# Altium PCB pmod_ssd.PcbDoc
Units mm, origin at the board's own origin, x right, y up, seen from the top; angles counter-clockwise.
Board outline 37.9 x 43.4 mm, 2 copper layers (Top Layer, Bottom Layer); 12 components, 20 nets, 58 pads, 13 vias.
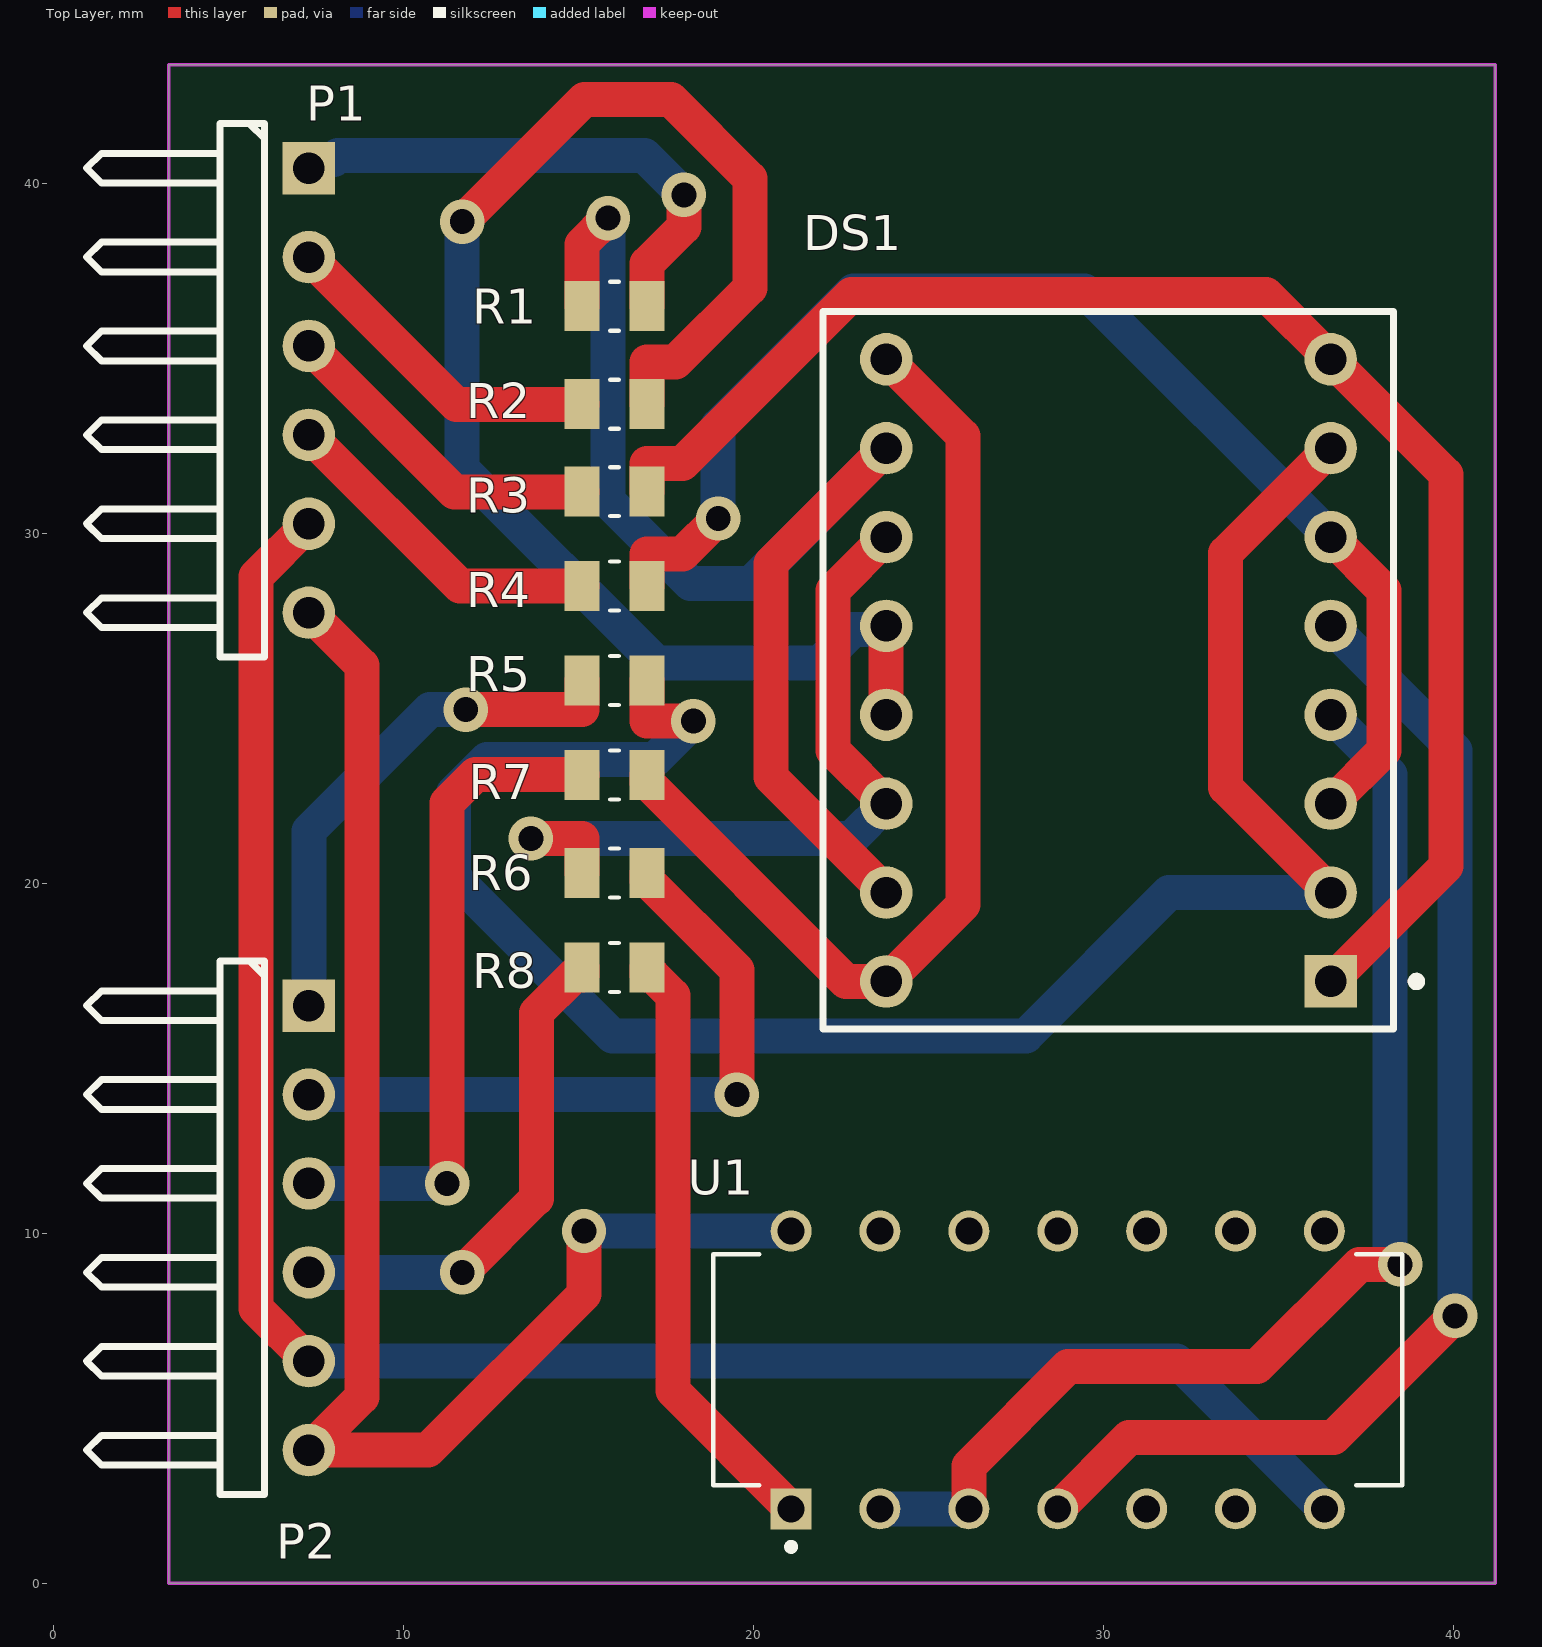
[diagram p0: Top Layer view]
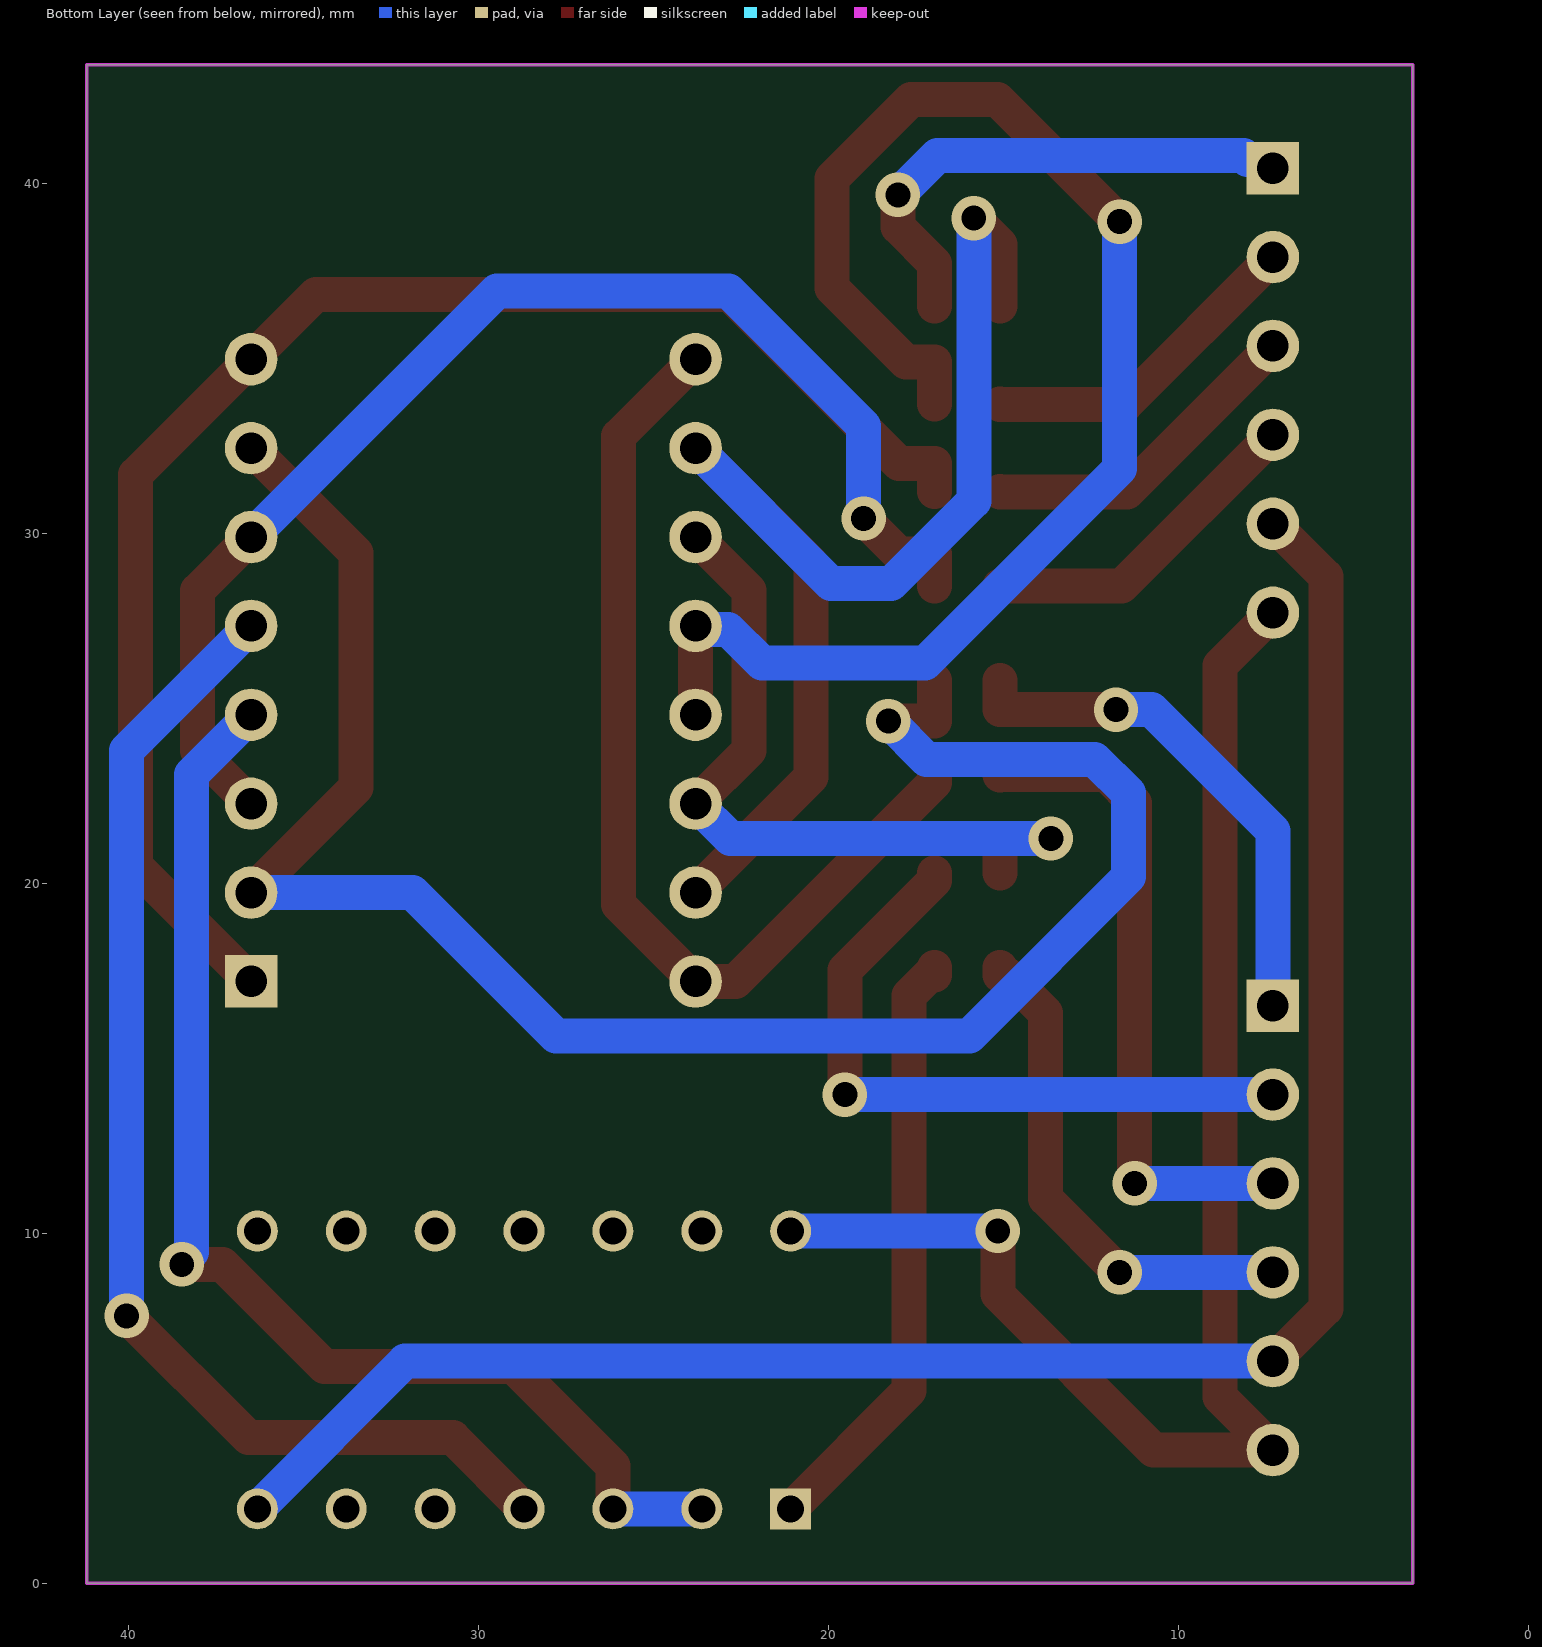
[diagram p1: Bottom Layer view, seen from below]

## Layer stack, top to bottom
Top Solder: solder mask 0.0102, Solder Resist, Dk 3.5
Top Layer: signal copper 0.0356
Dielectric 1: dielectric 0.32, FR-4, Dk 4.8
Bottom Layer: signal copper 0.0356
Bottom Solder: solder mask 0.0102, Solder Resist, Dk 3.5

## Board outline
3.3,0 41.2,0 41.2,43.4 3.3,43.4

## Design rules (kind name [scope] priority, off if disabled: settings)
Clearance [All] p1: gap=0.254 ignorepadtopadclearanceinfootprint=FALSE except(0: Arc-Hole Track-Hole SMDPad-Hole THPad-Hole Via-Hole Fill-Hole Poly-Hole Region-Hole Text-Hole)
PolygonConnect [All] p1: connectstyle=Relief reliefconductorwidth=0.254 reliefentries=4 polygonreliefangle="90 Angle" airgapwidth=0.254
RoutingVias [All] p1: holewidth=0.711 width=1.27 viastyle="Through Hole" minholewidth=0.711 minwidth=1.27 maxholewidth=0.711 maxwidth=1.27
SolderMaskExpansion [All] p1: expansion=0.102 istentingtop=FALSE
Width [All] p1: maxlimit=1.1 minlimit=0.9 preferedwidth=1
30 further rules are at their usual default settings.

## Components (designator, comment, footprint, x,y, rotation, side; value= is the part's Value field where it differs from the comment)
DS1 "HDSP-G03A" G-16 30.15,0.69 r90 top
P1 "J1" HDR1X6H 7.3,40.44 r270 top
P2 "J2" HDR1X6H 7.3,16.51 r270 top
R1 "5-2176327-9" RESC2012X65N 16.035,36.5 r180 top
R2 "5-2176327-9" RESC2012X65N 16.035,33.7 r0 top
R3 "5-2176327-9" RESC2012X65N 16.035,31.2 r0 top
R4 "5-2176327-9" RESC2012X65N 16.035,28.5 r0 top
R5 "5-2176327-9" RESC2012X65N 16.035,25.8 r0 top
R6 "5-2176327-9" RESC2012X65N 16.035,20.3 r180 top
R7 "5-2176327-9" RESC2012X65N 16.035,23.1 r0 top
R8 "5-2176327-9" RESC2012X65N 16.035,17.6 r0 top
U1 "CD74HC14EE4" DIP794W45P254L1969H508Q14 28.7,6.1 r90 top

## Footprints (in the part's own frame and the unit in brackets; to place one, negate y for a bottom-side part, rotate by r counter-clockwise, add the part's x,y. Pads: shape width x height; smd on the part's side, far side on the other; paste and mask are expansions set on the pad)
DIP794W45P254L1969H508Q14 [mm]
  rect 1.17x1.17 / inner round 1.17 / far side rect 1.17x1.17 hole 0.77: 1(-3.97,7.62)
  round 1.17 hole 0.77: 2(-3.97,5.08) 3(-3.97,2.54) 4(-3.97,0) 5(-3.97,-2.54) 6(-3.97,-5.08) 7(-3.97,-7.62) 8(3.97,-7.62) 9(3.97,-5.08) 10(3.97,-2.54) 11(3.97,0) 12(3.97,2.54) 13(3.97,5.08) 14(3.97,7.62)
  silkscreen extent -5.15,-9.85 3.3,9.84, body extent -4.1,-9.65 4.1,9.65, height 5.08
G-16 [mm] "LED, 7-Segment Display, 10.16 mm, Dual Digit; 16 Leads; Row Space 12.7 mm; Pitch 2.54 mm"
  rect 1.5x1.5 hole 0.9: 1(16.51,-6.35)
  round 1.5 hole 0.9: 2(19.05,-6.35) 3(21.59,-6.35) 4(24.13,-6.35) 5(26.67,-6.35) 6(29.21,-6.35) 7(31.75,-6.35) 8(34.29,-6.35) 9(34.29,6.35) 10(31.75,6.35) 11(29.21,6.35) 12(26.67,6.35) 13(24.13,6.35) 14(21.59,6.35) 15(19.05,6.35) 16(16.51,6.35)
  silkscreen extent 15.15,-8.93 35.65,8.15
HDR1X6H [mm] "Connector; Header; 6 Position; Right Angle"
  rect 1.5x1.5 hole 0.9: 1(0,0)
  round 1.5 hole 0.9: 2(2.54,0) 3(5.08,0) 4(7.62,0) 5(10.16,0) 6(12.7,0)
  silkscreen extent -1.27,-6.35 13.97,-1.27
RESC2012X65N [mm]
  rect 1x1.42 smd: 1(-0.935,0) 2(0.935,0)
  silkscreen extent -0.12,-0.7 0.12,0.7

## Part data
DS1: "10.16 mm 2-Digit General Purpose AlGaAs Red 7-Segment Display: CC, RH DP", LED_Colour="AlGaAs Red", PackageDocument=20-Aug-2001, ComponentLink1Description="Manufacturer Link", ComponentLink1URL=http://www.agilent.com/, ComponentLink2Description=Datasheet, ComponentLink2URL=http://cp.literature.agilent.com/litweb/pdf/5988-2972EN.pdf, DatasheetDocument=20-Aug-2001, LatestRevisionDate=11-Oct-2004, LatestRevisionNote="Display outline superimposed on PCB Footprint.", LuminousIntensity="3200 ucd (Minimum).", PackageReference=G-16, Published=26-May-2004, Publisher="Altium Limited"
P1 P2: library part "Header 6H", "Header, 6-Pin, Right Angle", LatestRevisionDate=17-Jul-2002, LatestRevisionNote="Re-released for DXP Platform.", Publisher="Altium Limited"
R1 R2 R3 R4 R5 R6 R7 R8: "Fixed Resistor CRGP 0805 680K 1%", Package=None, Availability=Unavailable, MP=5-2176327-9, Price=None
U1: "High Speed CMOS Logic Hex Schmitt-Triggered Inverters 14-PDIP -55 to 125", Package="PDIP-14 Texas Instruments", Availability="In Stock", Check_prices=https://www.snapeda.com/parts/CD74HC14EE4/Texas+Instruments/view-part/?ref=eda, MF="Texas Instruments", MP=CD74HC14EE4, Price=None, Purchase-URL=https://pricing.snapeda.com/search/part/CD74HC14EE4/?ref=eda, SnapEDA_Link=https://www.snapeda.com/parts/CD74HC14EE4/Texas+Instruments/view-part/?ref=snap

## Via types
v1: diameter 1.27, hole 0.711, Top Layer to Bottom Layer, 13 vias

## Nets (pads, with @x,y where several pads share a name; then routed paths per layer and width w, separated by ;. In a path a pad name is that pad's centre, name@x,y a point inside that pad or via, vN(x,y) a via of type N, cw(c..) or ccw(c..) an arc to the next point about the centre after c; other vN are vias at no path point)
GND: P1.5 P2.5 U1.7 | length 55.9
  Top Layer w1: P2.5 5.791,7.859 5.791,28.771 P1.5
  Bottom Layer w1: P2.5 32.1,6.35 U1.7
NetDS1_1: DS1.1 DS1.8 R3.2 | length 43.6
  Top Layer w1: R3.2 16.97,32.004 17.983,32.004 22.809,36.83 34.65,36.83 DS1.8 39.8,31.68 39.8,20.5 DS1.1
NetDS1_2: DS1.2 DS1.7 R5.2 | length 56.4
  Top Layer w1: R5.2 16.97,24.638 v1(18.288,24.638) ; DS1.2 33.5,22.74 33.5,29.44 DS1.7
  Bottom Layer w1: v1(18.288,24.638) 17.196,23.546 12.395,23.546 11.43,22.581 11.43,20.193 15.977,15.646 27.788,15.646 31.881,19.74 DS1.2
NetDS1_3: DS1.3 DS1.6 R4.2 | length 36.9
  Top Layer w1: R4.2 16.97,29.413 17.983,29.413 v1(18.999,30.429) ; DS1.3 38.024,23.804 38.024,28.376 DS1.6
  Bottom Layer w1: v1(18.999,30.429) 18.999,33.071 22.86,36.932 29.468,36.932 DS1.6
NetDS1_4: DS1.4 U1.2 U1.3 | length 35
  Top Layer w1: U1.3 26.16,3.36 28.998,6.198 34.398,6.198 37.319,9.119 v1(38.481,9.119)
  Bottom Layer w1: U1.2 U1.3 ; DS1.4 38.2,23.12 38.2,9.473 38.481,9.192 v1(38.481,9.119)
NetDS1_5: DS1.5 U1.4 | length 34.8
  Top Layer w1: U1.4 30.736,4.166 36.576,4.166 v1(40.056,7.645)
  Bottom Layer w1: DS1.5 40.056,23.804 v1(40.056,7.645)
NetDS1_9: DS1.9 DS1.16 R7.2 | length 29
  Top Layer w1: R7.2 16.97,22.885 22.655,17.2 DS1.16 26,19.4 26,32.78 DS1.9
NetDS1_10: DS1.10 DS1.15 R1.2 | length 36.9
  Top Layer w1: R1.2 15.1,38.265 v1(15.85,39.014) ; DS1.15 20.5,23.04 20.5,29.14 DS1.10
  Bottom Layer w1: v1(15.85,39.014) 15.85,30.933 18.208,28.575 19.935,28.575 DS1.10
NetDS1_11: DS1.11 DS1.14 R6.2 | length 21.9
  Top Layer w1: v1(13.644,21.285) 15.1,21.285 R6.2 ; DS1.14 22.276,23.804 22.276,28.376 DS1.11
  Bottom Layer w1: v1(13.644,21.285) 22.805,21.285 DS1.14
NetDS1_12: DS1.12 DS1.13 R2.2 | length 43.2
  Top Layer w1: v1(11.684,38.913) 15.171,42.4 17.646,42.4 19.9,40.146 19.9,37.02 17.78,34.9 16.97,34.9 R2.2 ; DS1.13 DS1.12
  Bottom Layer w1: v1(11.684,38.913) 11.684,31.852 17.236,26.3 21.906,26.3 22.87,27.264 23.704,27.264 DS1.12
NetP1_1: P1.1 R1.1 | length 14.9
  Top Layer w1: R1.1 16.97,37.719 18.016,38.765 v1(18.016,39.675)
  Bottom Layer w1: P1.1 7.55,40.69 8.026,40.69 8.136,40.8 16.891,40.8 v1(18.016,39.675)
NetP1_2: P1.2 R2.1 | length 9.6
  Top Layer w1: P1.2 11.52,33.68 15.1,33.68 R2.1
NetP1_3: P1.3 R3.1 | length 9.5
  Top Layer w1: P1.3 11.469,31.191 15.1,31.191 R3.1
NetP1_4: P1.4 R4.1 | length 9.6
  Top Layer w1: P1.4 11.621,28.499 R4.1
NetP2_1: P2.1 R5.1 | length 15.1
  Top Layer w1: v1(11.786,24.968) 15.1,24.968 R5.1
  Bottom Layer w1: P2.1 7.3,21.5 10.767,24.967 v1(11.786,24.968) v1(11.786,24.968)
NetP2_2: P2.2 R6.1 | length 19.6
  Top Layer w1: R6.1 16.97,20.089 19.533,17.526 v1(19.533,13.97)
  Bottom Layer w1: P2.2 v1(19.533,13.97)
NetP2_3: P2.3 R7.1 | length 19
  Top Layer w1: v1(11.252,11.43) 11.252,22.301 12.065,23.114 15.1,23.114 R7.1
  Bottom Layer w1: P2.3 v1(11.252,11.43)
NetP2_4: P2.4 R8.1 | length 14.6
  Top Layer w1: v1(11.684,8.89) 13.8,11.006 13.8,16.3 14.89,17.39 15.1,17.39 R8.1
  Bottom Layer w1: P2.4 v1(11.684,8.89)
NetR8_2: R8.2 U1.1 | length 17.3
  Top Layer w1: R8.2 16.97,17.39 17.114,17.39 17.7,16.804 17.7,5.51 U1.1
VCC: P1.6 P2.6 U1.14 | length 42.6
  Top Layer w1: P1.6 8.814,26.226 8.814,5.324 P2.6 10.71,3.81 15.164,8.264 v1(15.164,10.07)
  Bottom Layer w1: v1(15.164,10.07) U1.14
pads on no net: U1.5 U1.6 U1.8 U1.9 U1.10 U1.11 U1.12 U1.13

## Keep-outs
Keep-Out Layer:
  the board outline again, w0.1

## Other copper
Bottom Layer:

## Silkscreen, mask and mechanical layers (free items; w line width, h text height)
Top Overlay: